# Altium PCB PCB1.PcbDoc
Units mil, origin at the board's own origin, x right, y up, seen from the top; angles counter-clockwise.
Board outline 820 x 2400 mil, 2 copper layers (Top Layer, Bottom Layer); 16 components, 30 nets, 88 pads, 15 vias.
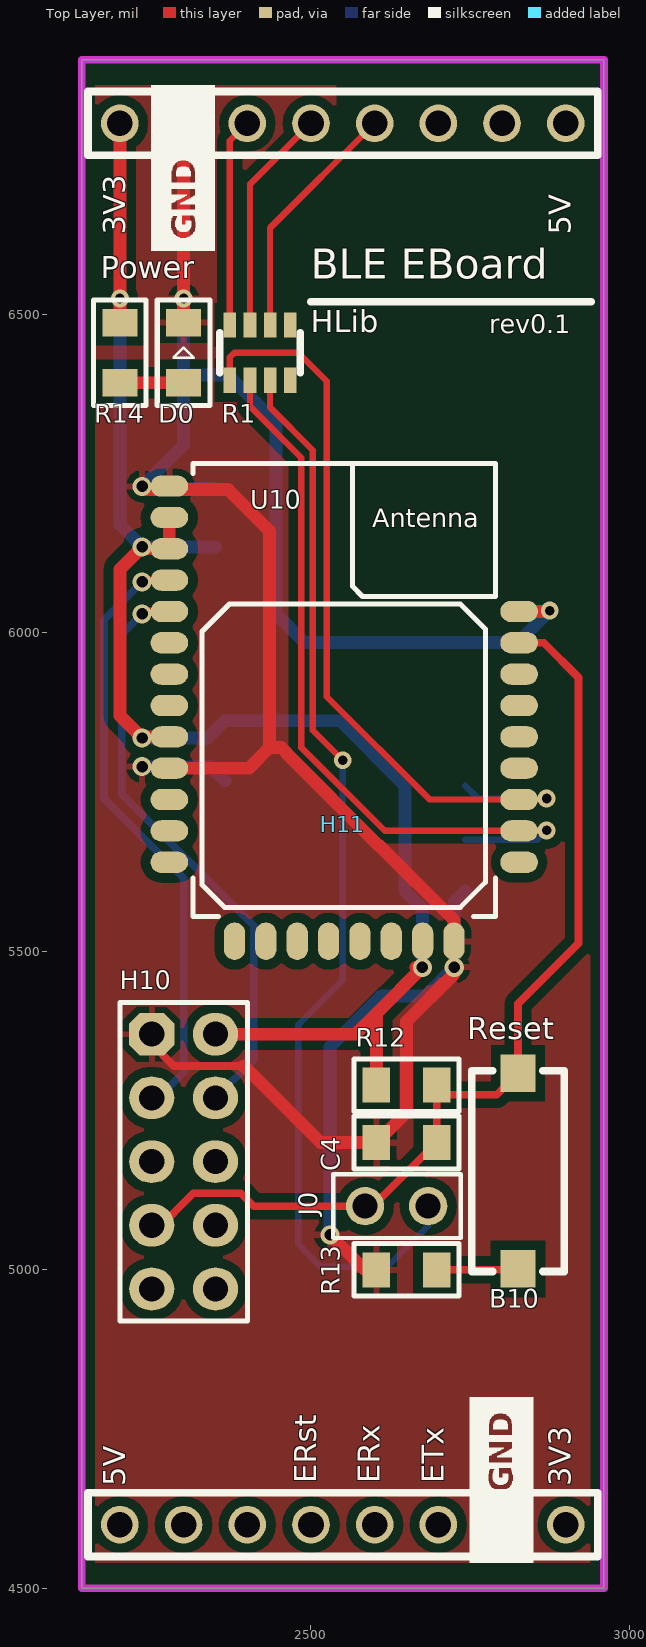
[diagram p0: Top Layer view]
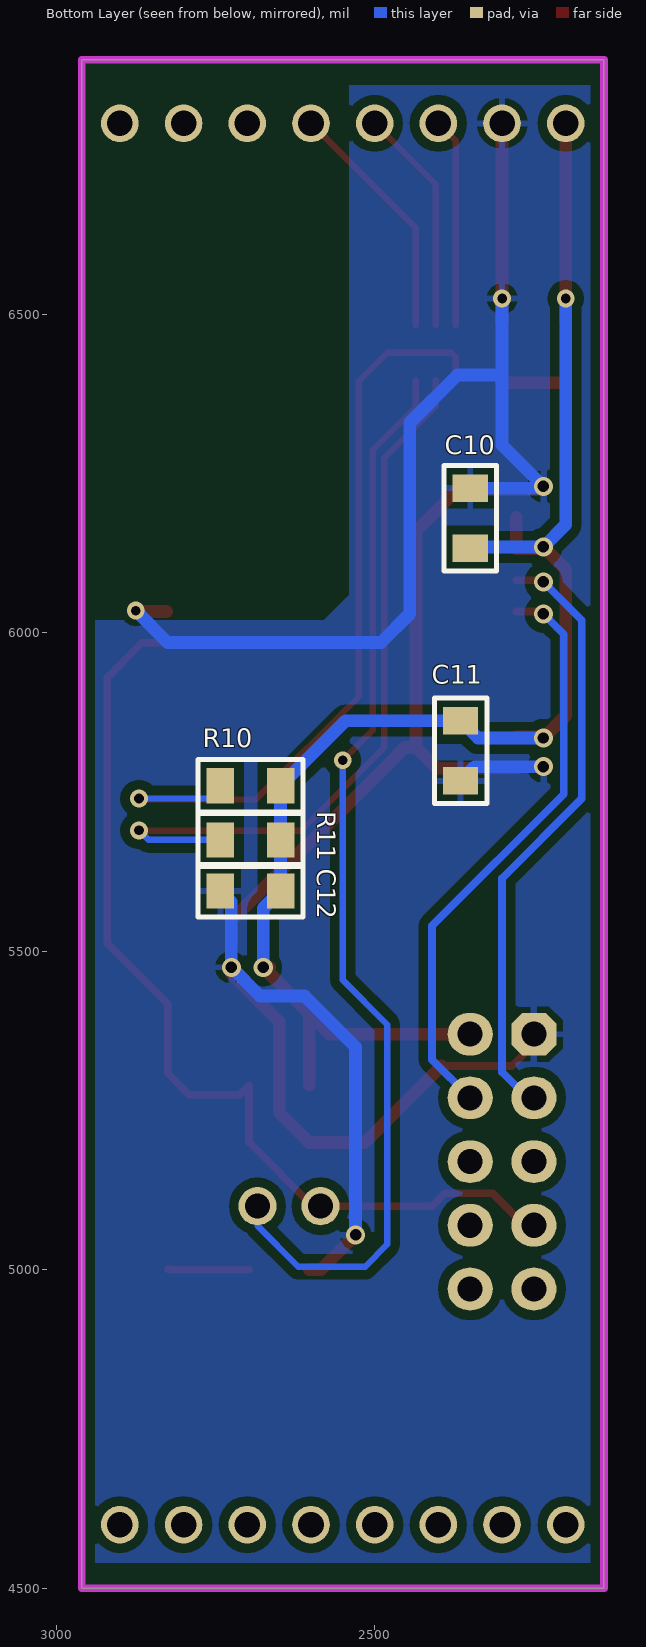
[diagram p1: Bottom Layer view, seen from below]
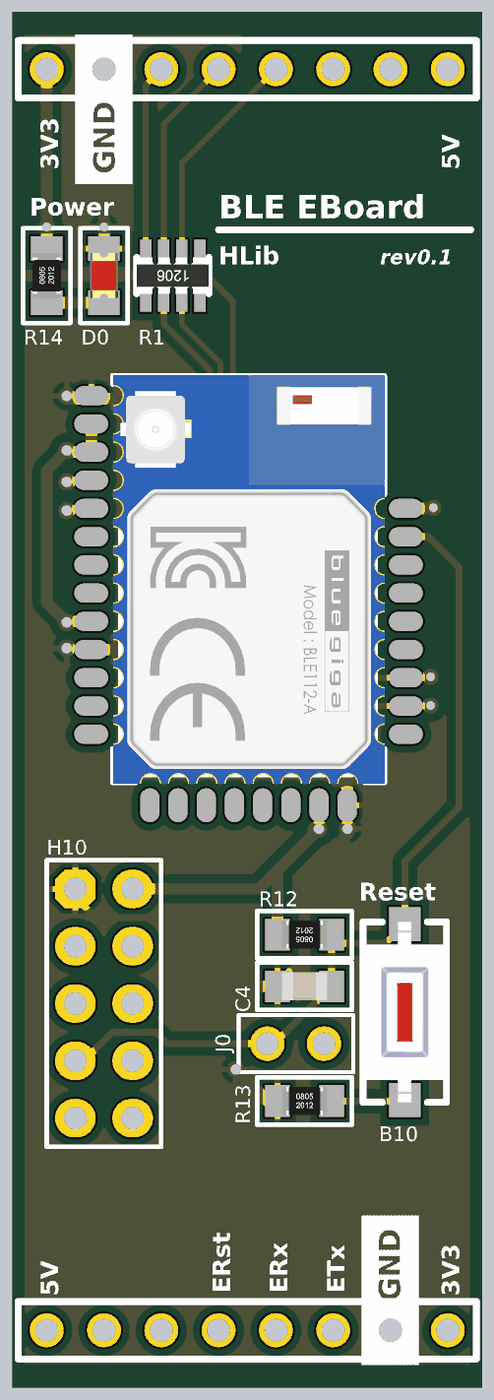
[diagram p2: 3D render of the assembled board from above, using the file's embedded part models]
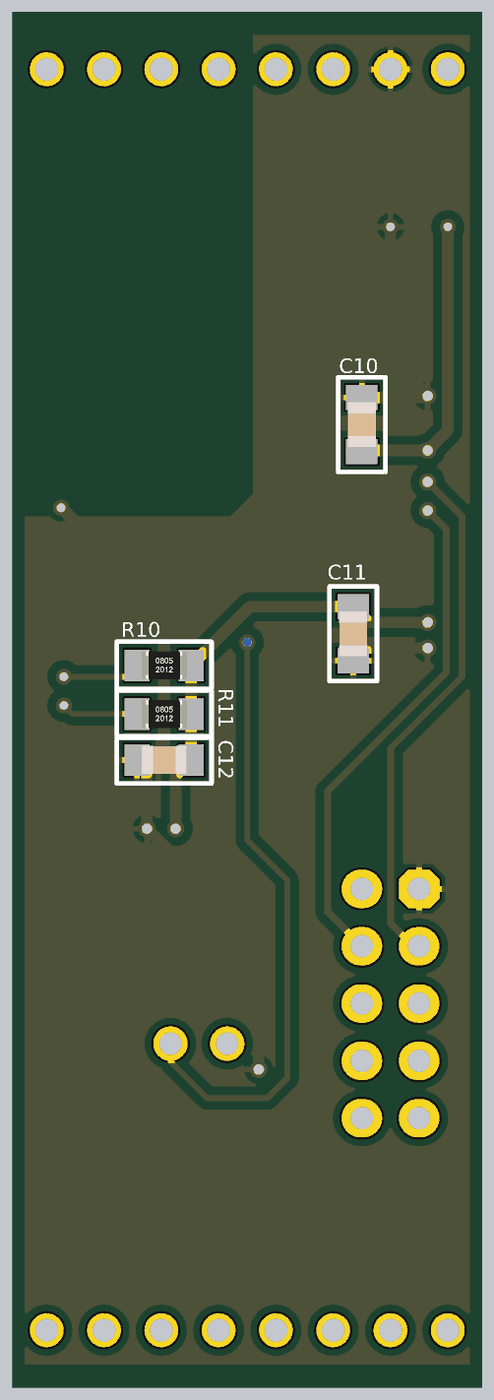
[diagram p3: 3D render of the assembled board from below, using the file's embedded part models]

## Layer stack, top to bottom
Top Solder: solder mask 0.4, Solder Resist, Dk 3.5
Top Layer: signal copper 1.4
Dielectric1: dielectric 12.6, FR-4, Dk 4.8
Bottom Layer: signal copper 1.4
Bottom Solder: solder mask 0.4, Solder Resist, Dk 3.5

## Board outline
2140,4500 2140,6900 2960,6900 2960,4500

## Design rules (kind name [scope] priority, off if disabled: settings)
Clearance [InPolygon] p1: gap=15
Clearance Clearance_1 [All] p2: gap=8
PolygonConnect [All] p1: connectstyle=Relief reliefconductorwidth=10 reliefentries=4 polygonreliefangle="90 Angle" airgapwidth=10
RoutingVias [All] p1: holewidth=25 width=40 viastyle="Through Hole" minholewidth=28 minwidth=50 maxholewidth=28 maxwidth=50
SolderMaskExpansion [All] p1: expansion=4
Width [All] p1: maxlimit=25 minlimit=8 preferedwidth=10
30 further rules are at their usual default settings.

## Components (designator, comment, footprint, x,y, rotation, side; value= is the part's Value field where it differs from the comment)
B10 "SW" SW2SMD 2825,5155 r270 top
C4 "C_Ceramic" SM_0805_C_CERAMIC 2650,5200 r0 top
C10 "C_Ceramic" SM_0805_C_CERAMIC 2350,6180 r270 bottom
C11 "C_Ceramic" SM_0805_C_CERAMIC 2365,5815 r90 bottom
C12 "C_Ceramic" SM_0805_C_CERAMIC 2695,5595 r180 bottom
D0 "LED" SM_0805_LED 2300,6440 r90 top
H10 "HD_5x2" HD_male_5x2_100mil_straight 2300,5170 r270 top
H11 "MBoard1_BH_DualPorts" MBoard1_BH_DualPorts 2200,6800 r0 top
J0 "Jumper 2" J2 2585,5100 r0 top
R1 "220" RA4 2420,6440 r180 top
R10 "R" SM_0805_R 2695,5760 r180 bottom
R11 "R" SM_0805_R 2695,5675 r180 bottom
R12 "R" SM_0805_R 2650,5290 r180 top
R13 "R" SM_0805_R 2650,5000 r0 top
R14 "R" SM_0805_R 2200,6440 r90 top
U10 "BLE112" BLE112 2380,5640 r0 top

## Footprints (in the part's own frame and the unit in brackets; to place one, negate y for a bottom-side part, rotate by r counter-clockwise, add the part's x,y. Pads: shape width x height; smd on the part's side, far side on the other; paste and mask are expansions set on the pad)
BLE112 [mm]
  oval 1.5x0.85 smd: 1(-2.6,15) 2(-2.6,13.75) 3(-2.6,12.5) 4(-2.6,11.25) 5(-2.6,10) 6(-2.6,8.75) 7(-2.6,7.5) 8(-2.6,6.25) 9(-2.6,5) 10(-2.6,3.75) 11(-2.6,2.5) 12(-2.6,1.25) 13(-2.6,0) 22(11.35,0) 23(11.35,1.25) 24(11.35,2.5) 25(11.35,3.75) 26(11.35,5) 27(11.35,6.25) 28(11.35,7.5) 29(11.35,8.75) 30(11.35,10)
  oval 0.85x1.5 smd: 14(0,-3.15) 15(1.25,-3.15) 16(2.5,-3.15) 17(3.75,-3.15) 18(5,-3.15) 19(6.25,-3.15) 20(7.5,-3.15) 21(8.75,-3.15)
  silkscreen extent -1.65,-2.16 10.41,15.9, body extent -1.62,-2.2 10.42,15.9, height 2.3
HD_male_5x2_100mil_straight [mm]
  oct 1.7x1.8 hole 1: 1(-5.08,-1.27)
  oval 1.7x1.8 hole 1: 2(-5.08,1.27) 3(-2.54,-1.27) 4(-2.54,1.27) 5(0,-1.27) 6(0,1.27) 7(2.54,-1.27) 8(2.54,1.27) 9(5.08,-1.27) 10(5.08,1.27)
  Mechanical 15 keep-out lines w0.1: 6.35,-2.54 6.35,2.54 -6.35,2.54 -6.35,-2.54 6.35,-2.54
  silkscreen extent -6.35,-2.54 6.35,2.54, body extent -6.35,-2.54 6.35,2.54, height 8
J2 [mil] "Jum select vdd or gnd"
  round 60 hole 39.37: 1(0,0) 2(99,0)
  silkscreen extent -50,-50 150,50
MBoard1_BH_DualPorts [mm]
  round 1.5 hole 1.02: 1(0,0) 2(2.54,0) 3(5.08,0) 4(7.62,0) 5(10.16,0) 6(12.7,0) 7(15.24,0) 8(17.78,0) 9(17.78,-55.88) 10(15.24,-55.88) 11(12.7,-55.88) 12(10.16,-55.88) 13(7.62,-55.88) 14(5.08,-55.88) 15(2.54,-55.88) 16(0,-55.88)
  silkscreen extent -1.27,-57.15 19.05,1.27, body extent -1.27,-57.15 19.05,1.27, height 8
RA4 [mm] "Resistor Array (0603x4) form TME"
  rect 0.5x1 smd: 1(-1.2,-1.1) 2(-1.2,1.1) 3(-0.4,-1.1) 4(-0.4,1.1) 5(0.4,-1.1) 6(0.4,1.1) 7(1.2,-1.1) 8(1.2,1.1)
  silkscreen extent -1.6,-0.8 1.6,0.8, body extent -1.6,-0.8 1.6,0.8, height 0.5
SM_0805_C_CERAMIC [mm] "General Surface-mount cap, low density"
  rect 1.1x1.4 smd: 1(-1.2,0) 2(1.2,0)
  silkscreen extent -2.1,-1.05 2.1,1.05, body extent -1,-0.62 1,0.63, height 0.58
SM_0805_LED [mm] "General polarized surface-mount Led, low density"
  rect 1.1x1.4 smd: 1(-1.2,0) 2(1.2,0)
  silkscreen extent -2.1,-1.05 2.1,1.05, body extent -1.01,-0.62 1.01,0.63, height 1.1
SM_0805_R [mm] "General Surface-mount resistor, low density"
  rect 1.1x1.4 smd: 1(-1.2,0) 2(1.2,0)
  silkscreen extent -2.1,-1.05 2.1,1.05, body extent -1,-0.63 1,0.62, height 0.45
SW2SMD [mm]
  rect 1.5x1.4 smd: 1(-3.9,0) 2(3.9,0)
  silkscreen extent -4,-1.85 4,1.85, body extent -4,-1.8 4,1.8, height 2.5

## Part data
B10: library part SW2, "Switch button 2 pin"
C4 C10 C11 C12: "Non-polarity ceramic capacitor"
H10: "Header, 5-pins/row, double row,"
J0: library part "JP 2"
R1: library part RA4
R10 R11 R12 R13 R14: "Resistor"

## Via types
v1: diameter 30, hole 18, Top Layer to Bottom Layer, tented both sides, 9 vias
v2: diameter 28, hole 15, Top Layer to Bottom Layer, tented both sides, 6 vias

## Nets (pads, with @x,y where several pads share a name; then routed paths per layer and width w, separated by ;. In a path a pad name is that pad's centre, name@x,y a point inside that pad or via, vN(x,y) a via of type N, cw(c..) or ccw(c..) an arc to the next point about the centre after c; other vN are vias at no path point)
3V3: C10.2 C11.2 C12.2 H10.2 H11.1 R10.2 R11.2 R12.2 R14.2 U10.2 U10.3 U10.9 U10.20 | length 2551.6
  Top Layer w20: R14.2 v2(2200,6525) H11.1 ; U10.9 2236.85,5836.85 v1(2235,5835) 2200,5870 2200,6100 v1(2235,6135) 2237.87,6132.13 U10.3 U10.2 ; H10.2 2570,5370 2602.76,5402.76 ; R12.2 2602.76,5402.76 ; v1@2665,5475 v1(2675,5475) 2602.76,5402.76
  Bottom Layer w20: v2(2200,6525) 2200,6170 v1(2235,6135) C10.2@2350,6135 ; v1(2235,5835) 2337.76,5835 C11.2 2545.51,5862.24 R10.2 R11.2 C12.2 2675,5567.76 v1(2675,5475)
DC: H10.3 U10.4 | length 966.2
  Top Layer w12: v1(2235,6080) 2237.91,6082.91 U10.4
  Bottom Layer w12: v1(2235,6080) 2175,6020 2175,5740 2300,5615 2300,5310 2257.5,5267.5 2257.5,5262.5 H10.3@2250,5255
DD: H10.4 U10.5 | length 943
  Top Layer w12: v1(2235,6030) 2238.7,6033.7 U10.5
  Bottom Layer w12: v1(2235,6030) 2203,5998 2203,5747 2410,5540 2410,5330 H10.4 H10.4@2350,5255
GND: C4.1 C10.1 C11.1 C12.1 D0.2 H10.1 H11.2 R13.1 U10.1 U10.10 U10.21 U10.30 | length 4581.6
  Top Layer w12: H10.1@2250,5355 2285,5320 2395,5320
  Top Layer w20: v1@2235,6230.55 2240.55,6225 2370,6225 2435,6160 2435,5820 ; H10.1@2250,5355 H10.1 ; U10.10 2402.64,5787.64 2435,5820 ; D0.2 v2(2300,6525) H11.2 ; 2395,5320 2515,5200 C4.1 2650,5247.24 2650,5390 2725,5465 v1(2725,5475) ; v1(2530,5055) 2585,5000 R13.1 ; U10.21 2724.49,5549.03 2607.31,5666.21 2606.26,5666.21 2462,5810.47 2462,5811.52 2453.52,5820 2435,5820 ; U10.30 2873.7,6033.7 v2(2875,6035)
  Bottom Layer w20: v1(2235,5790) 2342.76,5790 C11.1 ; v2(2300,6525) 2300,6405 ; C10.1 2237.76,6227.24 v1(2235,6230) 2300,6295 2300,6405 ; v1(2530,5055) 2530,5350 2610,5430 2680,5430 v1(2725,5475) 2725,5577.76 C12.1 ; v2(2875,6035) 2825,5985 2490,5985 2445,6030 2445,6330 2370,6405 2300,6405
NetB10_2: B10.2 R13.2 | length 128.4
  Top Layer w12: R13.2 2823.54,5000 B10.2
NetD0_1: D0.1 R14.1 | length 100
  Top Layer w20: R14.1 D0.1
NetH11_3: H11.3 R1.7 | length 328
  Top Layer w10: R1.7 2372.76,6772.76 H11.3
NetH11_4: H11.4 R1.5 | length 356.4
  Top Layer w10: R1.5 2404.25,6704.25 H11.4
NetH11_5: H11.5 R1.3 | length 384.7
  Top Layer w10: R1.3 2435.75,6635.75 H11.5
NetJ0_2: J0.2 R1.4 | length 1709
  Top Layer w10: R1.4 2435.75,6354.25 2503,6287 2503,5847 v2(2550,5800)
  Bottom Layer w10: v2(2550,5800) 2550,5455 2480,5385 2480,5040 2515,5005 2620,5005 2684,5069 J0.2
P0_0: U10.28
P0_1: U10.27
P0_2: U10.26
P0_3: U10.25
P0_4: R1.8 R10.1 U10.24 | length 1253.6
  Top Layer w10: R1.8 2372.76,6432.76 2380,6440 2480,6440 2525,6395 2525,5900 2686.57,5738.43 U10.24 2868.43,5738.43 v2(2870,5740)
  Bottom Layer w10: R10.1 2762.24,5740 v2(2870,5740)
P0_5: R1.6 R11.1 U10.23 | length 1183.6
  Top Layer w10: R1.6 2404.25,6355.75 2485,6275 2485,5820 2615.79,5689.21 U10.23 2869.21,5689.21 v2(2870,5690)
  Bottom Layer w10: R11.1 2855,5675 v2(2870,5690)
P0_6: U10.22
P0_7: U10.19
P1_0: U10.18
P1_1: U10.17
P1_2: U10.16
P1_3: U10.15
P1_4: U10.14
P1_5: U10.13
P1_6: U10.8
P1_7: U10.7
P2_0: U10.6
RST: B10.1 C4.2 H10.7 J0.1 R12.1 U10.29 | length 1527.7
  Top Layer w12: H10.7@2257.5,5062.5 2315,5120 2390,5120 2410,5100 J0.1 2597.24,5100 C4.2 R12.1 2712.24,5275 2791.46,5275 B10.1 2825,5417.76 2920,5512.76 2920,5930 2865.51,5984.49 U10.29
USB+: U10.11
USB-: U10.12
pads on no net: H10.5 H10.6 H10.8 H10.9 H10.10 H11.6 H11.7 H11.8 H11.9 H11.10 H11.11 H11.12 H11.13 H11.14 H11.15 H11.16 R1.1 R1.2

## Polygon pours and split planes (outlines as drawn)
GND on Bottom Layer "Bot" (solid, remove dead copper, pour order 4): 2140,6860 2960,6860 2960,4540 2140,4540
GND on Top Layer "Top" (solid, remove dead copper, pour order 4): 2140,6860 2960,6860 2960,4540 2140,4540

## Keep-outs
Keep-Out Layer:
  the board outline again, w12

## Other copper
Top Layer:
  pour cut-out: 2540,6860 2540,6060 2580,6020 2960,6020 2960,6860
Bottom Layer:
  pour cut-out: 2540,6860 2540,6060 2580,6020 2960,6020 2960,6860

## Silkscreen, mask and mechanical layers (free items; w line width, h text height)
Top Overlay:
  drawing of 607 lines, arcs and shapes, not listed
  text "3V3" at 2220,6625 h60 r90
  text "5V" at 2920,6625 h60 r90
  text "Power" at 2170,6545 h60
  text "BLE EBoard" at 2500,6540 h80
  text "HLib" at 2500,6460 h60
  text "rev0.1" at 2780,6460 h50
  text "Reset" at 2745,5350 h60
  text "ERst" at 2520,4665 h60 r90
  text "ERx" at 2620,4665 h60 r90
  text "ETx" at 2720,4665 h60 r90
  text "5V" at 2220,4660 h60 r90
  text "3V3" at 2920,4660 h60 r90
Drill Drawing:
  text ".LEGEND" at 7200,3200 h60
  text "Drill Drawing." at 7200,3100 h60

## Dimensions
2140,4500 to 2960,4500 on Mechanical 1
2140,4500 to 2140,6900 on Mechanical 1

## Text inside footprints (layer, text, board x,y; h text height)
U10: Top Overlay "Antenna" at 2596.54,6155.75 h50